# Altium PCB pcb.PcbDoc
Units mil, origin at the board's own origin, x right, y up, seen from the top; angles counter-clockwise.
Board outline 4000 x 2100 mil, 2 copper layers (Top Layer, Bottom Layer), stack 60.4 mil thick; 14 components, 12 nets, 72 pads, 6 vias.
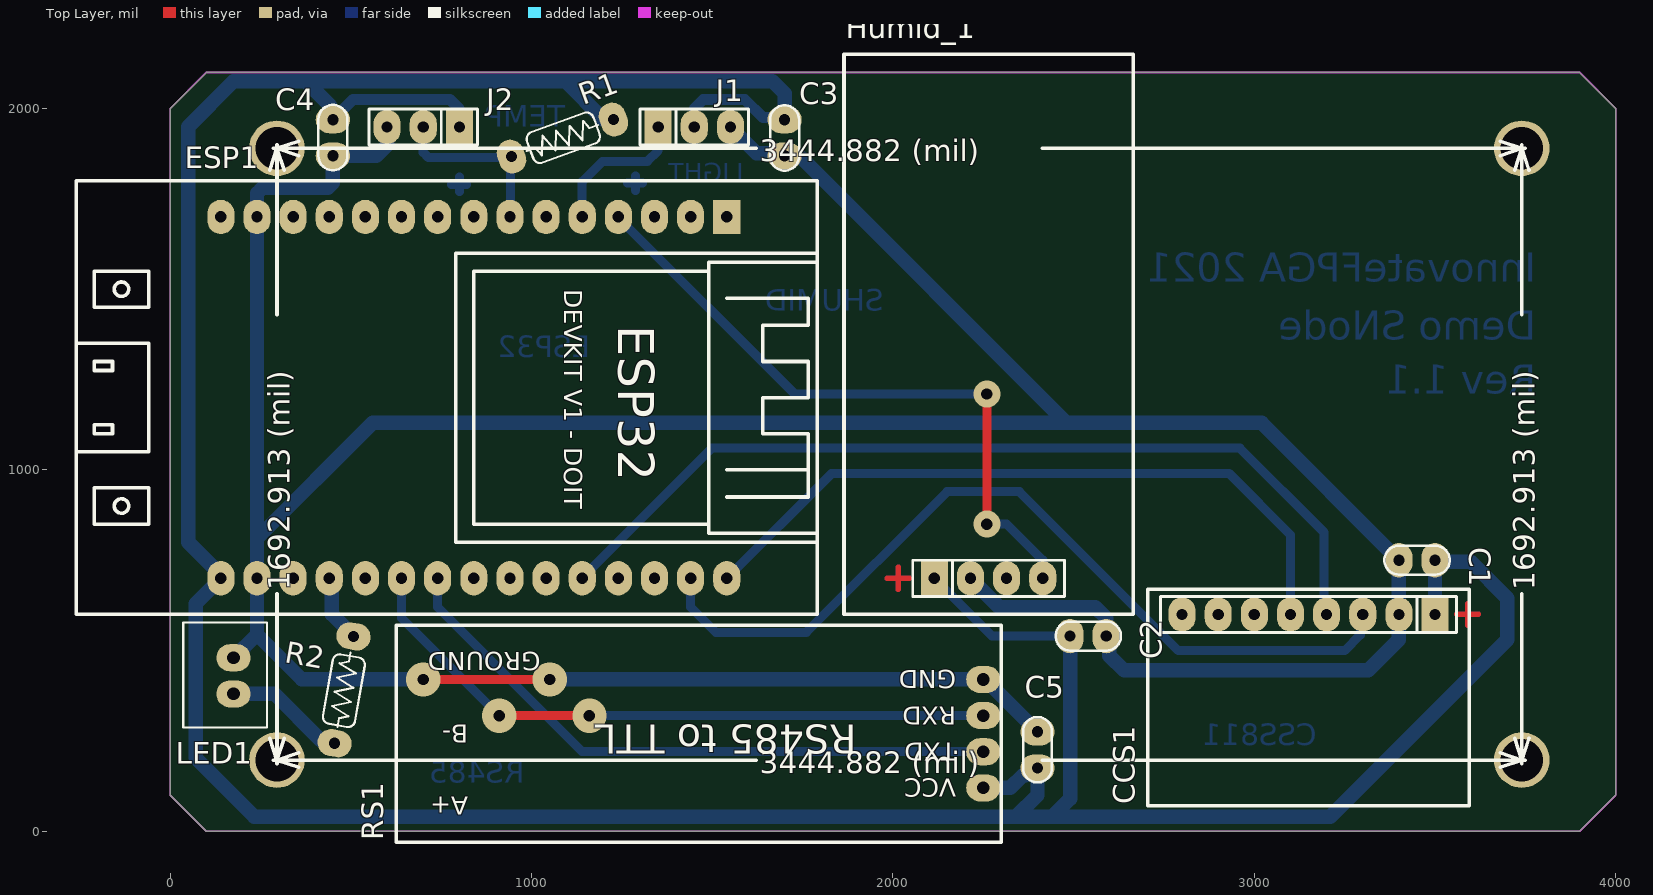
[diagram p0: Top Layer view]
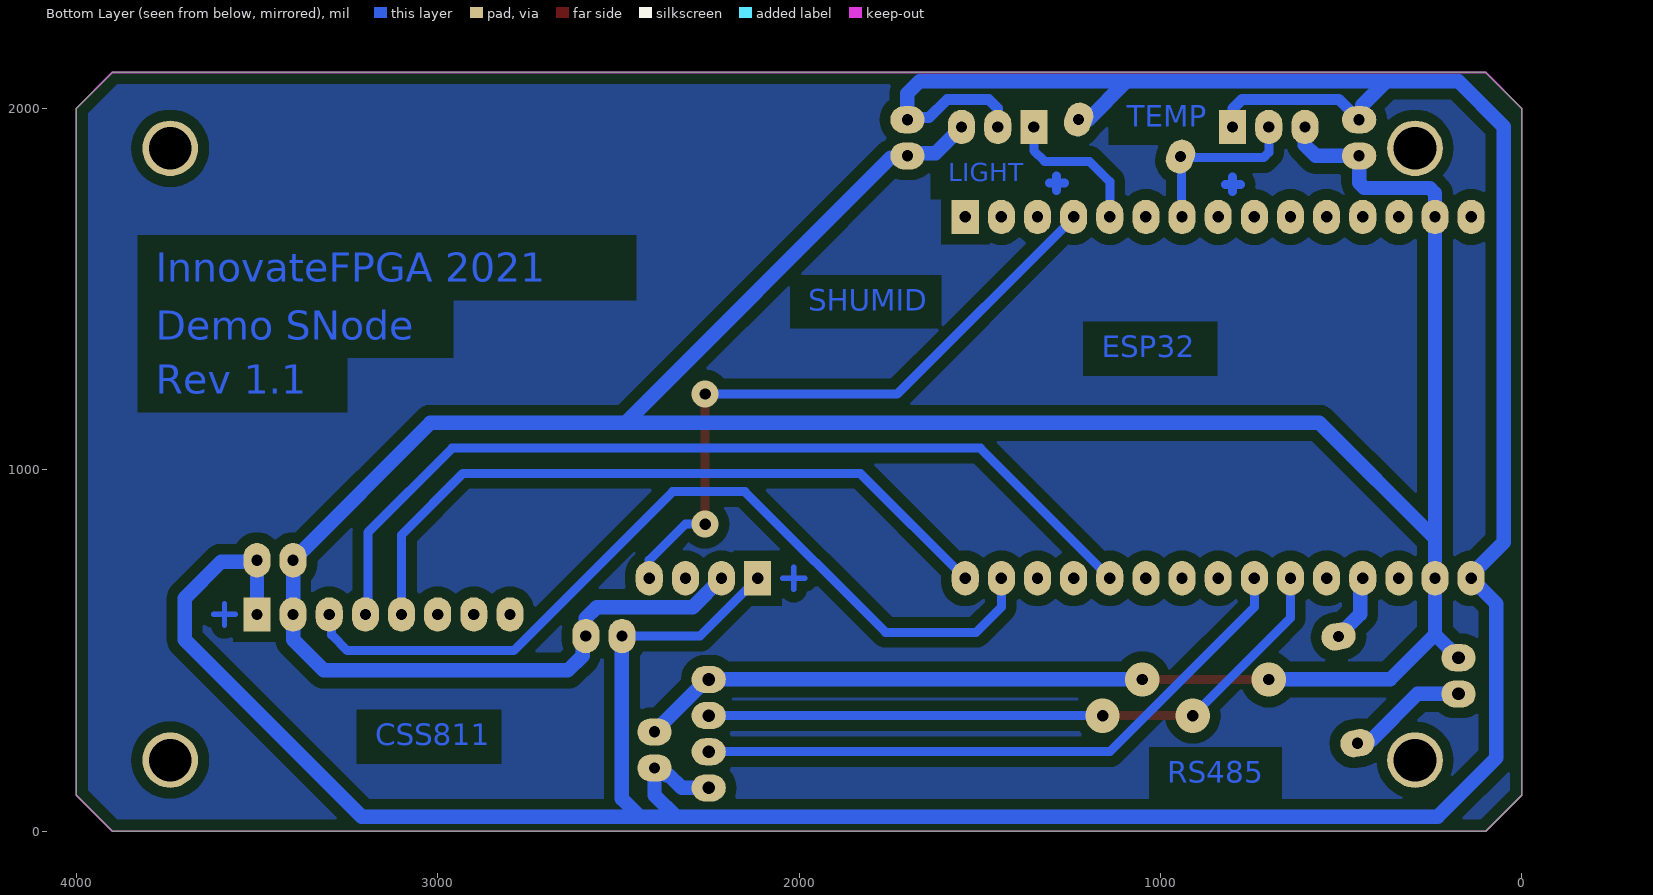
[diagram p1: Bottom Layer view, seen from below]
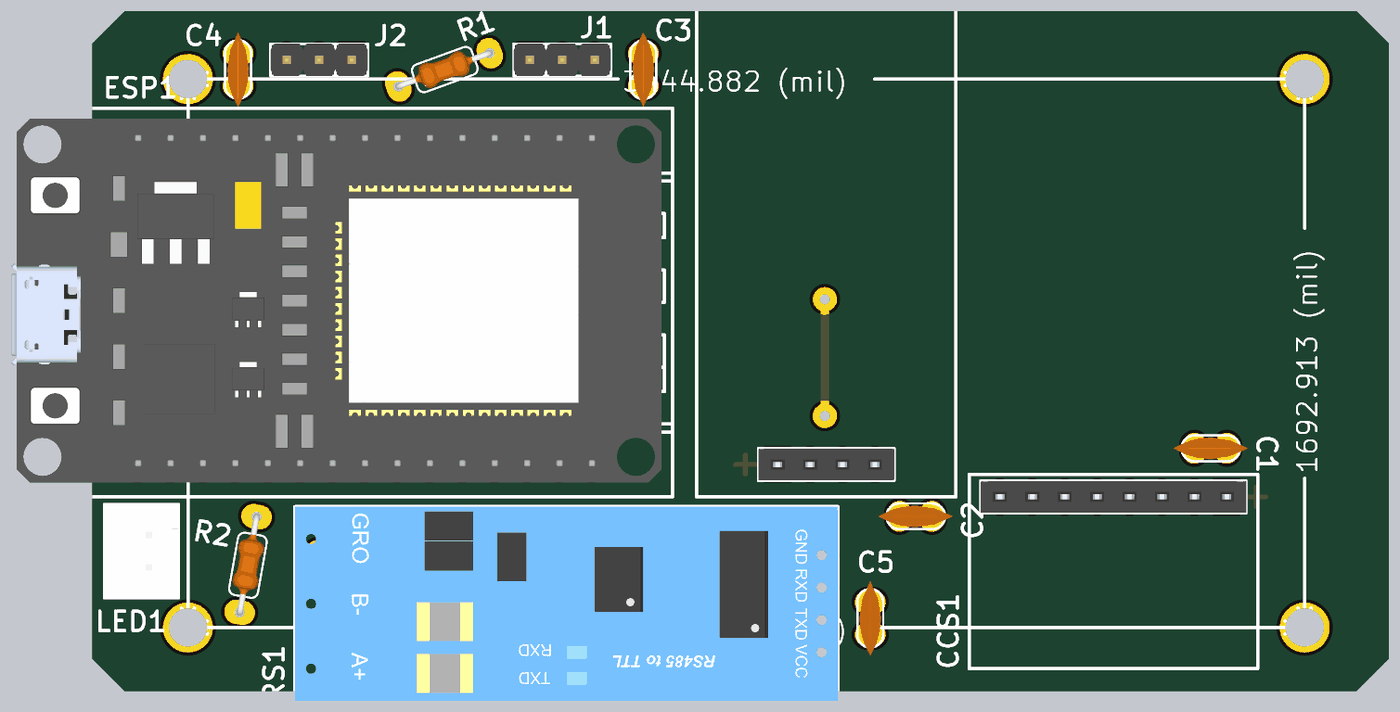
[diagram p2: 3D render of the assembled board from above, using the file's embedded part models]

## Layer stack, top to bottom
Top Solder: solder mask 0.5, Solder Resist, Dk 3.3
Top Layer: signal copper 0.7
Dielectric1: core 59, FR-4, Dk 4.3
Bottom Layer: signal copper 0.7
Bottom Solder: solder mask 0.5, Solder Resist, Dk 3.3

## Board outline
0,99.69 99.69,0 3900,0 4000,100 4000,2000 3900,2100 100,2100 0,2000

## Design rules (kind name [scope] priority, off if disabled: settings)
Clearance Clearance_4 [InNamedPolygon('NONE')] p1: gap=30 ignorepadtopadclearanceinfootprint=FALSE
DiffPairsRouting [All] p1: maxlimit=10 minlimit=10 mostfreqgap=10 toplayer_minwidth=10 toplayer_maxwidth=10 toplayer_prefwidth=10 bottomlayer_minwidth=10 bottomlayer_maxwidth=10 bottomlayer_prefwidth=10 maxuncoupledlength=500
HoleSize [All] p1: absolutevalues=TRUE maxlimit=300 minlimit=10 maxpercent=80.000 minpercent=20.000
MinimumAnnularRing [All] p1: minimumring=0
MinimumSolderMaskSliver [All] p1: minsoldermaskwidth=0
PasteMaskExpansion [All] p1: expansion=10
PlaneClearance [All] p1: clearance=15
PlaneConnect [All] p1: pad.planeconnectstyle=Relief pad.reliefexpansion=20 pad.reliefentries=4 pad.reliefconductorwidth=10 pad.reliefairgap=10 via.planeconnectstyle=Direct via.reliefexpansion=20 via.reliefentries=4 via.reliefconductorwidth=10 via.reliefairgap=10
PolygonConnect PolygonConnect_1 [All vs IsNamedPolygon('NONE')] p1: connectstyle=Relief reliefconductorwidth=10 reliefentries=4 polygonreliefangle="90 Angle" airgapwidth=10
PolygonConnect [All] p2: thpad.connectstyle=Relief thpad.reliefconductorwidth=10 thpad.reliefentries=4 thpad.polygonreliefangle="90 Angle" thpad.airgapwidth=10 smdpad.connectstyle=Relief smdpad.reliefconductorwidth=10 smdpad.reliefentries=4 smdpad.polygonreliefangle="90 Angle" smdpad.airgapwidth=10 via.connectstyle=Direct via.reliefconductorwidth=10 via.reliefentries=4 via.polygonreliefangle="90 Angle" via.airgapwidth=10
RoutingVias [All] p1: holewidth=10 width=20 viastyle="Through Hole" minholewidth=10 minwidth=20 maxholewidth=200 maxwidth=300
SMDNeckDown [All] p1: percent=100.000
SilkToSilkClearance [All] p1: silktosilkclearance=0
SilkToSolderMaskClearance SilkscreenOverComponentPads [IsPad] p1: minsilkscreentomaskgap=0 clearancetoexposedcopper=TRUE
SolderMaskExpansion [All] p1: expansion=10 istentingtop=FALSE
Width [All] p1: maxlimit=50 minlimit=25 preferedwidth=30
22 further rules are at their usual default settings.

## Components (designator, comment, footprint, x,y, rotation, side; value= is the part's Value field where it differs from the comment)
C1 "104" CAP-CERAMIC-100mil#1 3450,750 r0 top
C2 "104" CAP-CERAMIC-100mil#1 2540,540 r0 top
C3 "104" CAP-CERAMIC-100mil#1 1700,1919.02 r270 top
C4 "104" CAP-CERAMIC-100mil#1 450,1919.02 r90 top
C5 "104" CAP-CERAMIC-100mil#2 2400,225 r90 top
CCS1 "CCS811_HDC1080" CSS811-MODULE-TER-J8x1-F-2.54mm 3500,600 r180 top
ESP1 "ESP32" 2#ESP32_DEVKIT_V1 1540,1700 r270 top
Humid_1 "Soil Humidity Sensor" SOIL_HUMID_TER-J4x1-F-2.54mm 2114.48,700 r0 top
J1 "Header" TER-J3x1-M-2.54mm#1 1350,1949.01 r0 top
J2 "Header" TER-J3x1-M-2.54mm#2 800,1949.01 r180 top
LED1 "LED" TER-H2 175,380 r90 top
R1 "4K7" RES-HOLE-1/8W 1090,1920 r200 top
R2 "330" RES-HOLE-1/8W 480,386.47 r80 top
RS1 "RS485-Module" "5#RS485 to TTL - SIMPLIFIED" 2250,120 r180 top

## Footprints (in the part's own frame and the unit in brackets; to place one, negate y for a bottom-side part, rotate by r counter-clockwise, add the part's x,y. Pads: shape width x height; smd on the part's side, far side on the other; paste and mask are expansions set on the pad)
2#ESP32_DEVKIT_V1 [mil] "ESP32 DEVKIT V1"
  rect 95x75 hole 31.5: 1(0,0)
  oval 95x75 hole 31.5: 2(0,-100) 3(0,-200) 4(0,-300) 5(0,-400) 6(0,-500) 7(0,-600) 8(0,-700) 9(0,-800) 10(0,-900) 11(0,-1000) 12(0,-1100) 13(0,-1200) 14(0,-1300) 15(0,-1400) 16(1000,-1400) 17(1000,-1300) 18(1000,-1200) 19(1000,-1100) 20(1000,-1000) 21(1000,-900) 22(1000,-800) 23(1000,-700) 24(1000,-600) 25(1000,-500) 26(1000,-400) 27(1000,-300) 28(1000,-200) 29(1000,-100) 30(1000,0)
  silkscreen extent -100,-1800 1100,250, body extent -67,-1789 1055,216, height 422
"5#RS485 to TTL - SIMPLIFIED" [mil] "5#RS485 to TTL module"
  oval 95x75 hole 35: 1(0,0) 2(0,-100) 3(0,-200) 4(0,-300)
  silkscreen extent -50,-450 1625,150, body extent -50,-450 1625,150, height 195
CAP-CERAMIC-100mil#1 [mil] "CN1"
  oval 75x95 hole 31: 1(-50,0) 2(50,0)
  silkscreen extent -90,-40 91,40, body extent -115,-33 115,33, height 265
CAP-CERAMIC-100mil#2 [mil] "CN1"
  oval 75x95 hole 31.5: 1(-50,0) 2(50,0)
  silkscreen extent -90,-40 91,40, body extent -115,-33 115,33, height 265
CSS811-MODULE-TER-J8x1-F-2.54mm [mil] "8 row, straight, gold plating, JP8-C1T"
  rect 75x95 hole 31: 1(0,0)
  oval 75x95 hole 31: 2(100,0) 3(200,0) 4(300,0) 5(400,0) 6(500,0) 7(600,0) 8(700,0)
  Multi-Layer lines w15: -60,0 -120,0 ; -90,30 -90,-30
  silkscreen extent -95,-70 795,530, body extent -60,-49 760,49, height 335
RES-HOLE-1/8W [mil]
  oval 75x95 hole 31: 1(-145,0) 2(155,0)
  silkscreen extent -100,-45 110,45, body extent -154,-40 164,39, height 79
SOIL_HUMID_TER-J4x1-F-2.54mm [mil] "4 row, straight, gold plating, JP4-C1T"
  rect 75x95 hole 31: 1(0,0)
  oval 75x95 hole 31: 2(100,0) 3(200,0) 4(300,0)
  Multi-Layer lines w15: -130,0 -70,0 ; -100,-30 -100,30
  silkscreen extent -250,-100 550,1450, body extent -60,-49 360,49, height 335
TER-H2 [mil] "HDR2"
  oval 75x95 hole 35: 1(0,0) 2(100,0)
  silkscreen extent -93,-93 198,139, body extent -93,-91 198,138, height 279
TER-J3x1-M-2.54mm#1 [mil] "3 pins, 1 row, straight, gold plating, JP3-D1T"
  rect 75x95 hole 31.5: 1(0,0)
  oval 75x95 hole 31: 2(100,0) 3(200,0)
  silkscreen extent -50,-50 250,50, body extent -50,-50 250,50, height 336
TER-J3x1-M-2.54mm#2 [mil] "3 pins, 1 row, straight, gold plating, JP3-D1T"
  rect 75x95 hole 31: 1(0,0)
  oval 75x95 hole 31: 2(100,0) 3(200,0)
  silkscreen extent -50,-50 250,50, body extent -50,-50 250,50, height 336

## Part data
C1 C2 C3 C4 C5: library part CMP-003-000000-1, "Capacitor", Design Item ID=CAP, Source=Library.SchLib
CCS1: "https://www.thegioiic.com/products/ccs811-mach-cam-bien-khi-co-chat-luong-khong-khi"
ESP1: library part 2#B#ESP32_DOIT_DEVKIT_V1
Humid_1: "https://www.thegioiic.com/products/cam-bien-do-am-dat-dau-do-chong-an-mon"
J1 J2: library part CMP-004-000002-1, Design Item ID="Header 3x1", Source=Library.SchLib
LED1: library part CMP-009-000000-2, "Light Emitting Diode", Code - JEDEC=DO-214-AB, Design Item ID=LED, Published=8-Jun-2000, Publisher="Altium Limited", Revision="July-2002: Re-released for DXP Platform.", Source=Library.SchLib
R1 R2: library part CMP-011-000003-1, "Resistor", Class=Passive, Design Item ID=RES, Published=08/06/2021, Source=Library.SchLib, SubClass=R
RS1: library part "5#RS485 to TTL - simplified", "https://www.thegioiic.com/products/mach-chuyen-doi-rs485-to-ttl"

## Free pads (board coordinates)
  round 154 hole 118.11: 0(295.28,196.85) 0(295.28,1889.76) 0(3740.16,196.85) 0(3740.16,1889.76)

## Via types
v1: diameter 95, hole 31.5, Top Layer to Bottom Layer, 4 vias
v2: diameter 75, hole 31.5, Top Layer to Bottom Layer, 2 vias

## Nets (pads, with @x,y where several pads share a name; then routed paths per layer and width w, separated by ;. In a path a pad name is that pad's centre, name@x,y a point inside that pad or via, vN(x,y) a via of type N, cw(c..) or ccw(c..) an arc to the next point about the centre after c; other vN are vias at no path point)
+3.3: C1.2 C2.1 C3.1 C4.2 C5.1 CCS1.1 ESP1.16 Humid_1.1 J1.2 J2.1 R1.1 RS1.1 | length 10352.6
  Bottom Layer w25: Humid_1.1 2274.48,540 C2.1
  Bottom Layer w30: C4.2 505.98,2025 774.01,2025 799.01,2000 J2.1@799.01,1950 ; J1.2 1450,2000 1475,2025 1590,2025 1640,1975 C3.1@1694.02,1975
  Bottom Layer w40: C4.2 441.39,1977.63 441.39,2008.61 375,2075 ; J2.1@799.01,1950 J2.1 ; R1.1@1200,1969.02 1094.02,2075 ; C3.1 1700,2041.52 1666.52,2075 1094.02,2075 ; RS1.1 2325,120 2359.86,154.86 2367.68,154.86 2387.82,175 C5.1 2400,100 2340,40 ; C2.1 2490,90 2440,40 ; CCS1.1 C1.2 3504.49,745.51 3599.49,745.51 3700,645 3700,529.84 3210.16,40 2440,40 ; 375,2075 1094.02,2075 ; 375,2075 175,2075 50,1950 50,800 140,710 ESP1.16 140,699.47 70,629.47 70,203 233,40 2340,40 ; 2340,40 2440,40
GND: C1.1 C2.2 C3.2 C4.1 C5.2 CCS1.2 ESP1.14 ESP1.17 Humid_1.2 J1.3 J2.3 LED1.2 RS1.4 | length 10414.4
  Top Layer w25: v1(700,420) v1(1050,420)
  Bottom Layer w40: LED1.2 175.53,480 240,544.47 ; J2.3 600,1899.01 570.01,1869.02 C4.1 450,1794.64 435.36,1780 255,1780 240,1765 ESP1.14 240,810 ; v1(700,420) 364.47,420 240,544.47 ; v1(1050,420) 2255,420 C5.2 ; J1.3 1622.34,1876.68 1692.35,1876.68 1705.74,1863.28 1746.72,1863.28 2480,1130 ; Humid_1.2 2294.48,620 2560,620 2590,590 C2.2 2598.61,531.39 2598.61,485.9 2639.51,445 3315,445 3400,530 CCS1.2 C1.1 3020,1130 2480,1130 ; 240,544.47 ESP1.17 240,810 ; 240,810 560,1130 2480,1130
I2C_SCL: CCS1.3 ESP1.29 | length 2383.5
  Bottom Layer w25: ESP1.29 1440,620 1510,550 1760,550 2150,940 2350,940 2790,500 3250,500 3293.33,543.33 3293.33,593.33 CCS1.3
I2C_SDA: CCS1.4 ESP1.26 | length 2529.5
  Bottom Layer w25: ESP1.26 1140,701.64 1498.36,1060 2960,1060 3193.33,826.67 3193.33,606.67 CCS1.4
I2C_WAKE: CCS1.5 ESP1.30 | length 1970.5
  Bottom Layer w25: ESP1.30 1830,990 2930,990 3100,820 CCS1.5
LIGHT_ADC: ESP1.5 J1.1 | length 408.5
  Bottom Layer w25: ESP1.5 1140,1797.47 1196.3,1853.77 1320,1853.77 1350,1883.77 J1.1
NetESP1_19: ESP1.19 R2.2 | length 188.6
  Bottom Layer w40: ESP1.19 447.41,692.59 447.41,599.97 506.92,540.47 R2.2
NetLED1_1: LED1.1 R2.1 | length 336.3
  Bottom Layer w40: LED1.1 288.39,380 416.29,252.1 446.39,252.1 R2.1
ONE_WIRE: ESP1.7 J2.2 R1.2 | length 487.7
  Bottom Layer w25: J2.2 700,1878.66 714.64,1864.02 941.38,1864.02 R1.2@942.17,1864.81 ; ESP1.7 942.17,1702.17 R1.2@942.17,1864.81 ; R1.2 R1.2@942.17,1864.81
RXD: ESP1.21 RS1.3 | length 1831.8
  Top Layer w25: v1(910,320) v1(1160,320)
  Bottom Layer w25: ESP1.21 640,590 v1(910,320) ; v1(1160,320) RS1.3
SOIL_ADC: ESP1.4 Humid_1.4 | length 1829.8
  Top Layer w25: v2(2260,850) v2(2260,1210)
  Bottom Layer w25: ESP1.4 1240,1698.36 1728.36,1210 v2(2260,1210) ; v2(2260,850) 2314.48,850 2414.48,750 Humid_1.4
TXD: ESP1.22 RS1.2 | length 1755.7
  Bottom Layer w25: ESP1.22 740,620 1140,220 RS1.2
pads on no net: CCS1.6 CCS1.7 CCS1.8 ESP1.1 ESP1.2 ESP1.3 ESP1.6 ESP1.8 ESP1.9 ESP1.10 ESP1.11 ESP1.12 ESP1.13 ESP1.15 ESP1.18 ESP1.20 ESP1.23 ESP1.24 ESP1.25 ESP1.27 ESP1.28 Humid_1.3
copper on no net: | length 205.4
  Bottom Layer w25: 800,1770 800,1810 ; 800,1790 778.66,1790 820,1790 ; 1287.25,1773.79 1287.25,1813.79 ; 1287.25,1793.79 1265.91,1793.79 1307.25,1793.79

## Polygon pours and split planes (outlines as drawn)
no net on Bottom Layer "NONE" (solid, pour order 0): 0,99.69 99.69,0 3900,0 4000,100 4000,2000 3900,2100 100,2100 0,2000

## Keep-outs
Keep-Out Layer:
  the board outline again, w5

## Other copper
Bottom Layer:
  text "TEMP" at 1093.04,1950 h60
  text "LIGHT" at 1586.5,1798.83 h50
  text "InnovateFPGA 2021" at 3780,1520 h80
  text "SHUMID" at 1974.57,1441 h60
  text "Demo SNode" at 3780,1360 h80
  text "ESP32" at 1161.87,1311 h60
  text "Rev 1.1" at 3780,1210 h80
  text "CSS811" at 3172.33,237.85 h60
  text "RS485" at 981.32,134.27 h60

## Silkscreen, mask and mechanical layers (free items; w line width, h text height)
Top Overlay:
  lines w10: 275.28,256.85 295.28,196.85 ; 275.28,1829.76 295.28,1889.76 ; 285.28,196.85 305.28,196.85 ; 285.28,1889.76 305.28,1889.76 ; 295.28,186.85 295.28,206.85 ; 295.28,657.43 295.28,196.85 ; 295.28,1429.19 295.28,1889.76 ; 295.28,1879.76 295.28,1899.76 ; 315.28,256.85 295.28,196.85 ; 315.28,1829.76 295.28,1889.76 ; 355.28,176.85 295.28,196.85 ; 355.28,216.85 295.28,196.85 ; 355.28,1869.76 295.28,1889.76 ; 355.28,1909.76 295.28,1889.76 ; 1621.84,196.85 295.28,196.85 ; 1621.84,1889.76 295.28,1889.76 ; 2413.59,196.85 3740.16,196.85 ; 2413.59,1889.76 3740.16,1889.76 ; 3680.16,176.85 3740.16,196.85 ; 3680.16,216.85 3740.16,196.85 ; 3680.16,1869.76 3740.16,1889.76 ; 3680.16,1909.76 3740.16,1889.76 ; 3720.16,256.85 3740.16,196.85 ; 3720.16,1829.76 3740.16,1889.76 ; 3730.16,196.85 3750.16,196.85 ; 3730.16,1889.76 3750.16,1889.76 ; 3740.16,186.85 3740.16,206.85 ; 3740.16,657.43 3740.16,196.85 ; 3740.16,1429.19 3740.16,1889.76 ; 3740.16,1879.76 3740.16,1899.76 ; 3760.16,256.85 3740.16,196.85 ; 3760.16,1829.76 3740.16,1889.76
  text "3444.882 (mil)" at 1631.84,1853.77 h60
  text "1692.913 (mil)" at 331.27,667.43 h60 r90
  text "1692.913 (mil)" at 3776.15,667.43 h60 r90
  text "3444.882 (mil)" at 1631.84,160.86 h60

## Text inside footprints (layer, text, board x,y; h text height)
ESP1: Top Overlay "DEVKIT V1 - DOIT" at 1090,1500 h50 r270
RS1: Top Overlay "RS485 to TTL" at 1900,295 h80 r180; Top Overlay "GROUND" at 1025,495 h50 r180; Top Overlay "B-" at 825,295 h50 r180; Top Overlay "A+" at 825,95 h50 r180; Top Overlay "GND" at 2175,445 h50 r180; Top Overlay "RXD" at 2175,345 h50 r180; Top Overlay "TXD" at 2175,245 h50 r180; Top Overlay "VCC" at 2175,145 h50 r180